# Altium PCB ESP-MONITOR_PCB.PcbDoc (part 1 of 2)
Units mm, origin at the board's own origin, x right, y up, seen from the top; angles counter-clockwise.
Board outline 62 x 40.01 mm, 2 copper layers (Top Layer, Bottom Layer); 71 components, 47 nets, 234 pads, 216 vias.
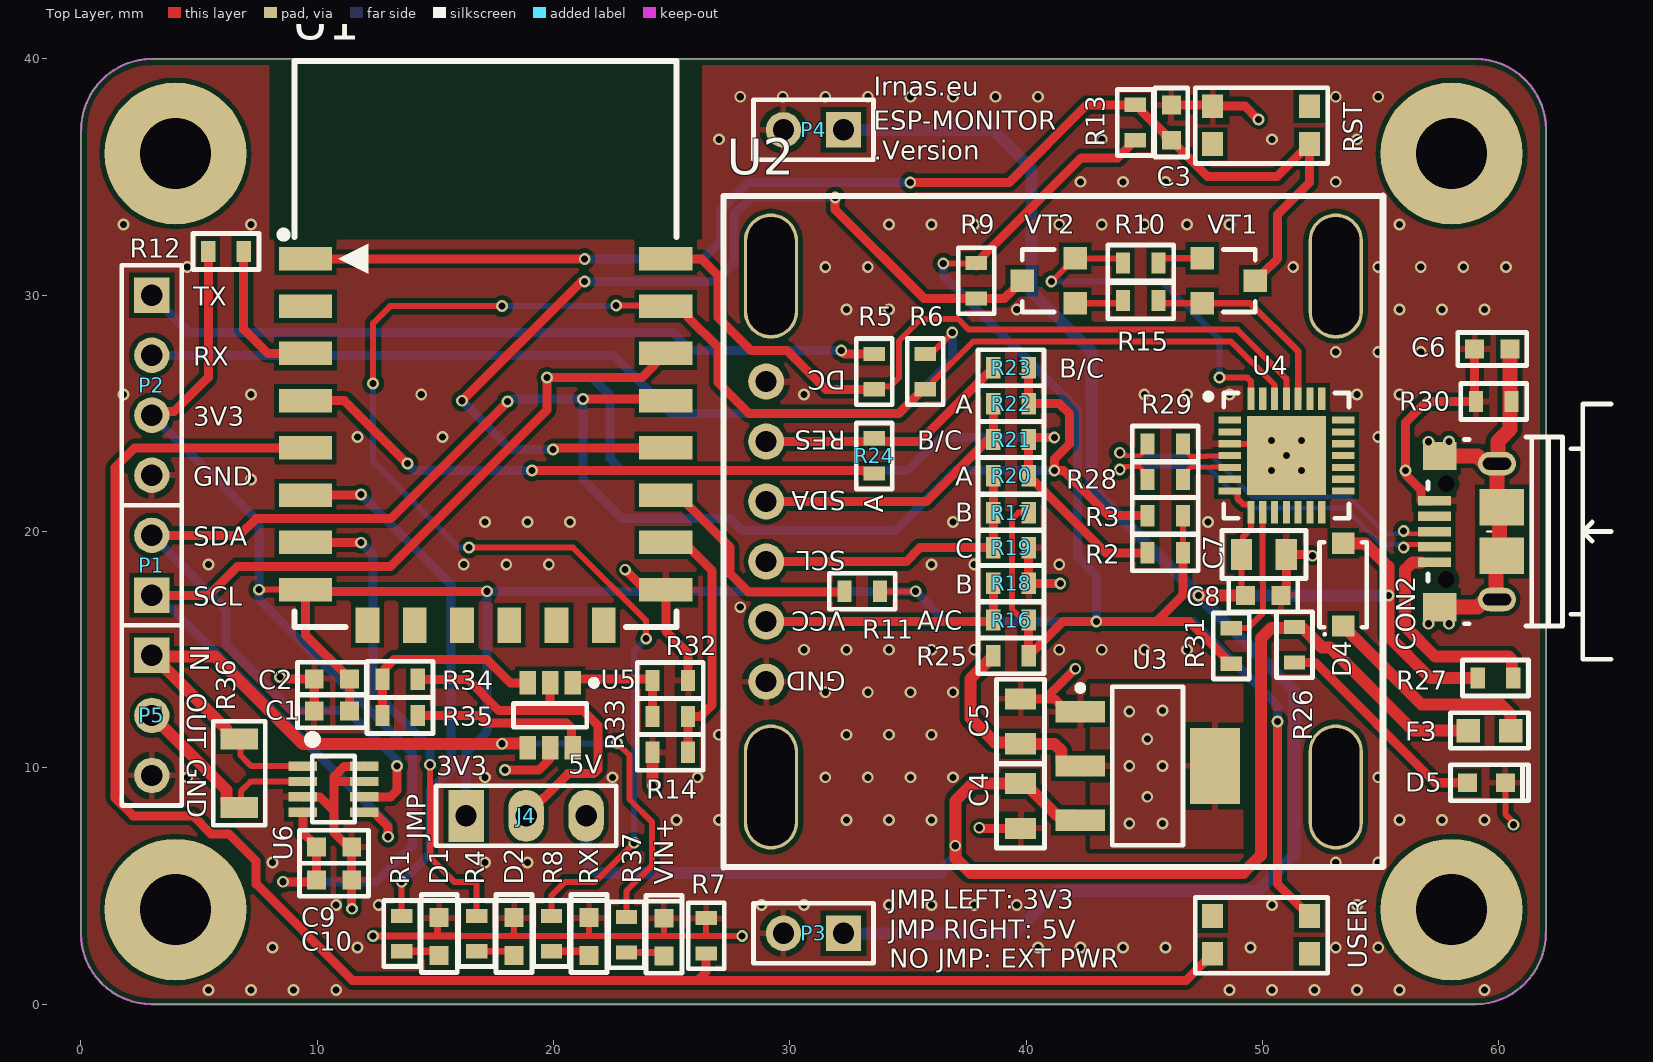
[diagram p0: Top Layer view]
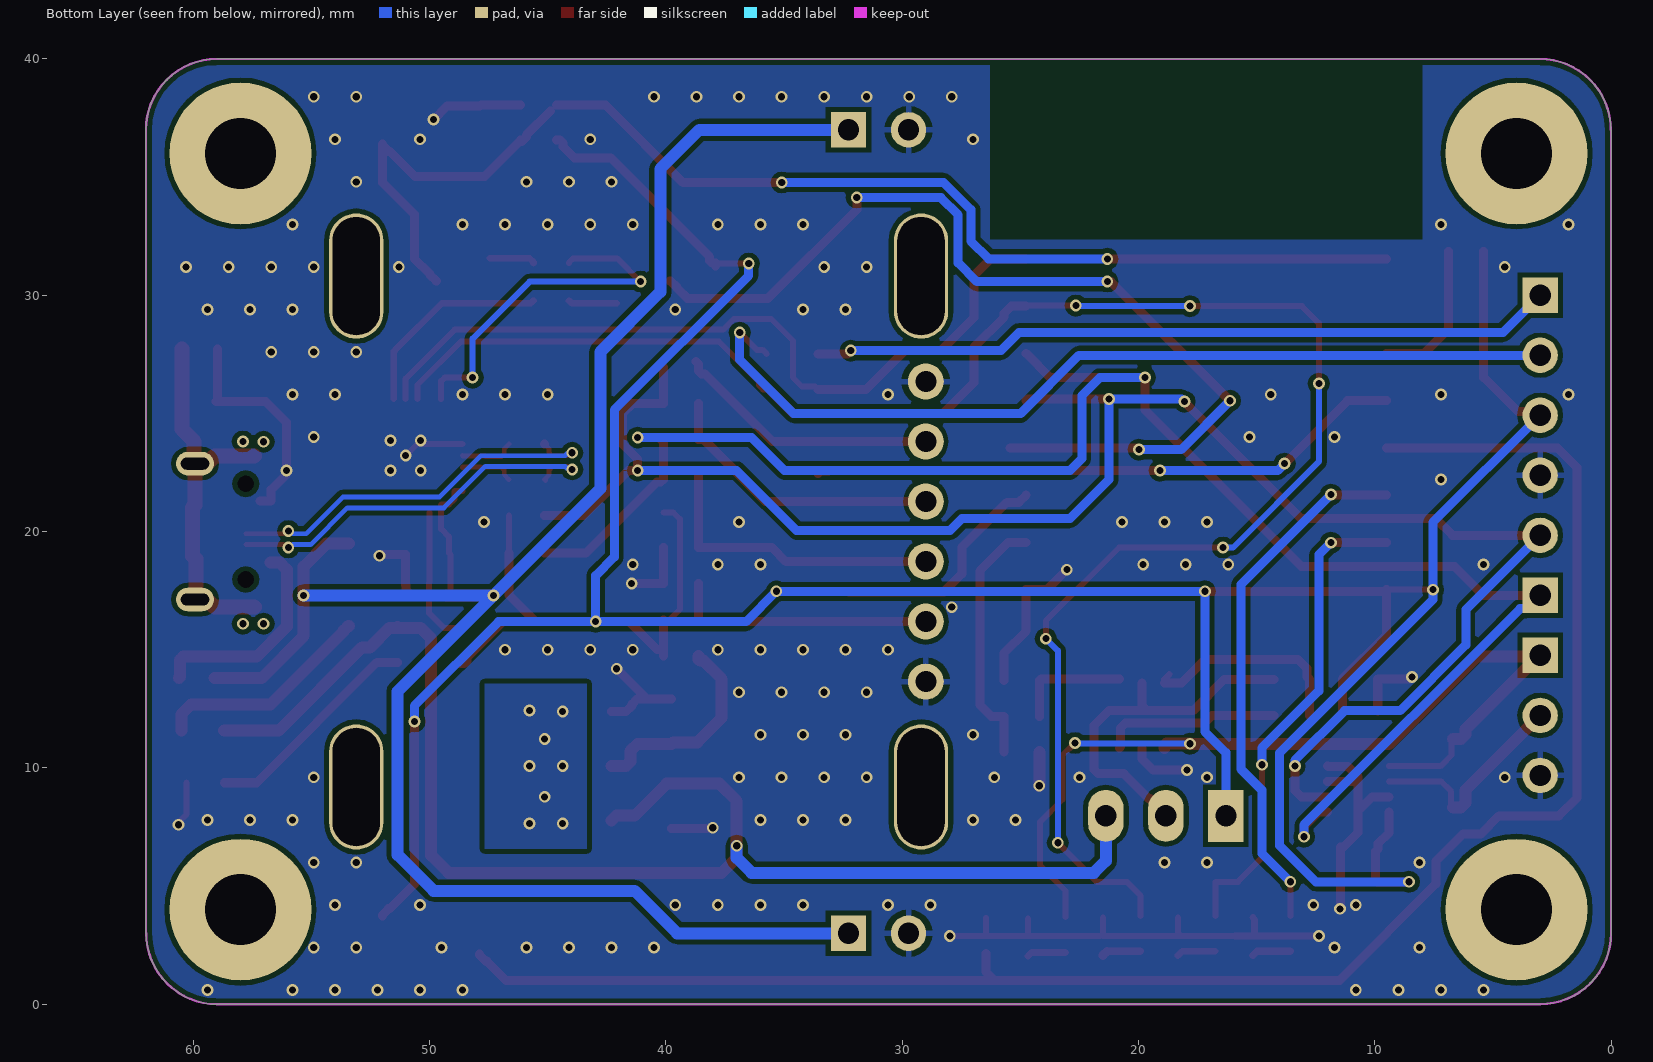
[diagram p1: Bottom Layer view, seen from below]

## Layer stack, top to bottom
Top Solder: solder mask 0.0102, Solder Resist, Dk 3.5
Top Layer: signal copper 0.0356
Dielectric 1: dielectric 0.32, FR-4, Dk 4.8
Bottom Layer: signal copper 0.0356
Bottom Solder: solder mask 0.0102, Solder Resist, Dk 3.5

## Board outline
0,3 ccw(c3,3) 3,0 59,0 58.991,-0.009 ccw(c58.974,3.007) 61.991,3.007 62,3.007 62,37 ccw(c59,37) 59,40 3.01,40 ccw(c3.01,37) 0.01,37 0,36.99

## Design rules (kind name [scope] priority, off if disabled: settings)
Clearance [All] p1: gap=0.203 ignorepadtopadclearanceinfootprint=FALSE except(0.152: Arc-Arc Arc-Track Track-Track SMDPad-SMDPad)
ComponentClearance [All] p1 off: gap=0.254 collisioncheckmode=3 verticalgap=0.254 showdistances=FALSE
DiffPairsRouting [All] p1: maxlimit=0.254 minlimit=0.254 mostfreqgap=0.254 toplayer_minwidth=0.203 toplayer_maxwidth=0.203 toplayer_prefwidth=0.203 bottomlayer_minwidth=0.203 bottomlayer_maxwidth=0.203 bottomlayer_prefwidth=0.203 maxuncoupledlength=12.7
Height [All] p1 off: minheight=0 maxheight=25.4 prefheight=12.7
HoleSize [All] p1: absolutevalues=TRUE maxlimit=7.62 minlimit=0.025 maxpercent=80.000 minpercent=20.000
PlaneConnect [All] p1: planeconnectstyle=Direct reliefexpansion=0.508 reliefentries=4 reliefconductorwidth=0.254 reliefairgap=0.254
PolygonConnect [All] p1: thpad.connectstyle=Relief thpad.reliefconductorwidth=0.254 thpad.reliefentries=4 thpad.polygonreliefangle="90 Angle" thpad.airgapwidth=0.254 smdpad.connectstyle=Relief smdpad.reliefconductorwidth=0.254 smdpad.reliefentries=4 smdpad.polygonreliefangle="90 Angle" smdpad.airgapwidth=0.254 via.connectstyle=Direct via.reliefconductorwidth=0.254 via.reliefentries=4 via.polygonreliefangle="90 Angle" via.airgapwidth=0.254
RoutingVias [All] p1: holewidth=0.3 width=0.5 viastyle="Through Hole" minholewidth=0.3 minwidth=0.5 maxholewidth=0.3 maxwidth=0.5
SilkToSilkClearance [All] p1 off: silktosilkclearance=0.254
SilkToSolderMaskClearance [IsPad] p1 off: minsilkscreentomaskgap=0.254 clearancetoexposedcopper=TRUE
SolderMaskExpansion [All] p1: expansion=0.102
Width [All] p1: maxlimit=1.27 minlimit=0.203 preferedwidth=0.254
23 further rules are at their usual default settings.

## Classes and differential pairs
component class PAGE5-CURRENT_MON: C9 C10 J4 P5 R32 R33 R34 R35 R36 R37 U5 U6 VIN+
component class PAGE2-ESP12_CORE: C1 C2 C3 D1 D2 P1 P2 R1 R2 R3 R4 R5 R6 R7 R8 R9 R10 R11 R12 R13 R14 R15 R16 R17 R18 R19 R20 R21 R22 R23 R24 RST RX U1 U2 USER VT1 VT2
component class PAGE4-POWER: C4 C5 D4 D5 F3 P3 P4 R25 R26 U3
component class PAGE3-USB_TO_UART: C6 C7 C8 CON2 R27 R28 R29 R30 R31 U4
differential pair DUSB: +DUSB_P -DUSB_N
differential pair D: +D_P -D_N

## Components (designator, comment, footprint, x,y, rotation, side; value= is the part's Value field where it differs from the comment)
C1 "1uF" CAP0603 10.623,12.401 r0 top
C2 "100nF" CAP0603 10.623,13.768 r0 top
C3 "100nF" CAP0603 46.144,37.31 r270 top
C4 "10uF /16V" CAP0805 39.763,8.385 r90 top
C5 "10uF /16V" CAP0805 39.763,11.968 r270 top
C6 "100pF" CAP0603 59.727,27.728 r0 top
C7 "10uF /16V" CAP0805 50.061,19.032 r180 top
C8 "100nF" CAP0603 50.036,17.3 r180 top
C9 "1uF" CAP0603 10.709,6.659 r180 top
C10 "100nF" CAP0603 10.709,5.262 r180 top
CON2 "microUSB" microUSB-CHINA 58.701,20 r90 top
D1 "LED RED" LED0603 15.159,2.86 r270 top
D2 "LED RED" LED0603 18.33,2.86 r270 top
D4 "MBR120VLSFT3G" SOD123 53.41,17.752 r90 top
D5 "LED RED" LED0603 59.479,9.37 r180 top
F3 "750mA" FUSE0603 59.606,11.578 r180 top
J4 "Jumper_1x3" Jumper_1x3_2.54MM 16.299,7.973 r90 top
P1 "Header 2" HDR1X2 3,17.3 r90 top
P2 "Header 4" HDR1X4 3,30 r270 top
P3 "Header 2" HDR1X2 32.27,3 r180 top locked
P4 "Header 2" HDR1X2 32.27,37 r180 top locked
P5 "Header 3" HDR1X3 3,14.76 r270 top
R1 "470R" RES0603 13.573,2.987 r270 top
R2 "4k7" RES0603 45.89,19.102 r0 top
R3 "4k7" RES0603 45.89,20.673 r0 top
R4 "470R" RES0603 16.744,2.987 r270 top
R5 "0R" RES0603 33.571,26.769 r90 top
R6 "0R" RES0603 35.73,26.769 r90 top
R7 "10k" RES0603 26.459,2.893 r270 top
R8 "470R" RES0603 19.916,2.987 r90 top
R9 "10k" RES0603 37.889,30.613 r270 top
R10 "10k" RES0603 44.849,31.365 r180 top
R11 "10k" RES0603 33.063,17.473 r180 top
R12 "10k" RES0603 6.139,31.849 r0 top
R13 "10k" RES0603 44.62,37.31 r90 top
R14 "10k" RES0603 24.94,10.665 r0 top
R15 "10k" RES0603 44.849,29.774 r0 top
R16 "A/C" RES0603 39.358,16.256 r180 top
R17 "B" RES0603 39.358,20.8 r180 top
R18 "B" RES0603 39.358,17.807 r180 top
R19 "C" RES0603 39.358,19.318 r180 top
R20 "A" RES0603 39.358,22.363 r180 top
R21 "B/C" RES0603 39.358,23.896 r180 top
R22 "A" RES0603 39.358,25.411 r180 top
R23 "B/C" RES0603 39.358,26.935 r180 top
R24 "A" RES0603 33.571,23.201 r90 top
R25 "0R" RES0603 39.358,14.741 r0 top
R26 "470R" RES0603 51.351,15.212 r90 top
R27 "0R" RES0603 59.86,13.8 r0 top
R28 "27R" RES0603 45.89,22.202 r180 top
R29 "27R" RES0603 45.89,23.702 r180 top
R30 "1M" RES0603 59.79,25.5 r0 top
R31 "10k" RES0603 48.684,15.158 r90 top
R32 "100k" RES0603 24.94,13.694 r180 top
R33 "100R" RES0603 24.94,12.17 r180 top
R34 "100k" RES0603 13.505,13.746 r180 top
R35 "100R" RES0603 13.505,12.22 r180 top
R36 "0.1R 1%" RES1206 6.698,9.776 r270 top
R37 "470R" RES0603 23.087,2.935 r90 top
RST "Tactile button" "Tactile button" 49.958,37.18 r0 top (schematic designator SW2)
RX "LED RED" LED0603 21.502,2.86 r270 top (schematic designator D3)
U1 "ESP_12_E" ESP_12_E 9.125,31.54 r0 top
U2 "OLED SSD1306" "OLED SSD1306" 29,16.19 r90 top
U3 "NCP1117" "SOT-223 - 4con" 45.139,10.08 r180 top
U4 "CP2102N" QFN50P500X500X80_HS-29N 51.01,23.215 r0 top
U5 "DMG6602SVT" TSOT26 19.855,12.22 r270 top
U6 "INA219AIDCNR" SOT23-8 10.69,9.099 r270 top
USER "Tactile button" "Tactile button" 49.958,2.911 r0 top (schematic designator SW1)
VIN+ "LED RED" LED0603 24.673,2.835 r270 top (schematic designator D6)
VT1 "L8050QLT1G" SMT_TRIODE_NPN 48.573,30.613 r270 top
VT2 "L8050QLT1G" SMT_TRIODE_NPN 40.953,30.613 r90 top

## Footprints (in the part's own frame and the unit in brackets; to place one, negate y for a bottom-side part, rotate by r counter-clockwise, add the part's x,y. Pads: shape width x height; smd on the part's side, far side on the other; paste and mask are expansions set on the pad)
CAP0603 [mm]
  rect 0.8x0.8 smd: 1(-0.75,0) 2(0.75,0)
  silkscreen extent -1.46,-0.7 1.46,0.7, body extent -0.8,-0.4 0.8,0.4, height 0.9
CAP0805 [mm]
  rect 0.9x1.3 smd: 1(-0.95,0) 2(0.95,0)
  silkscreen extent -1.78,-1.02 1.78,1.02, body extent -1,-0.6 1,0.6, height 1.5
ESP_12_E [mm] "ESP-12 Wi-Fi Module by AI-Thinker"
  rect 2.25x1 smd: 1(0.375,0) 2(0.375,-2) 3(0.375,-4) 4(0.375,-6) 5(0.375,-8) 6(0.375,-10) 7(0.375,-12) 8(0.375,-14) 15(15.625,-14) 16(15.625,-12) 17(15.625,-10) 18(15.625,-8) 19(15.625,-6) 20(15.625,-4) 21(15.625,-2) 22(15.625,0)
  rect 1x1.5 smd: 9(3,-15.5) 10(5,-15.5) 11(7,-15.5) 12(9,-15.5) 13(11,-15.5) 14(13,-15.5)
  silkscreen extent -0.7,-15.57 16.08,8.37, body extent 0,-15.49 16,8.51, height 2.75
FUSE0603 [mm]
  rect 1x1 smd: 1(-0.9,0) 2(0.9,0)
  silkscreen extent -1.65,-0.75 1.65,0.75, body extent -0.8,-0.37 0.8,0.38, height 0.77
HDR1X2 [mm] "Connector; Header; 2 Position"
  rect 1.5x1.5 hole 0.9: 1(0,0)
  round 1.5 hole 0.9: 2(2.54,0)
  silkscreen extent -1.27,-1.27 3.81,1.27
HDR1X3 [mm] "Connector; Header; 3 Position"
  rect 1.5x1.5 hole 0.9: 1(0,0)
  round 1.5 hole 0.9: 2(2.54,0) 3(5.08,0)
  silkscreen extent -1.27,-1.27 6.35,1.27
HDR1X4 [mm] "Connector; Header; 4 Position"
  rect 1.5x1.5 hole 0.9: 1(0,0)
  round 1.5 hole 0.9: 2(2.54,0) 3(5.08,0) 4(7.62,0)
  silkscreen extent -1.27,-1.27 8.89,1.27
Jumper_1x3_2.54MM [mm] "Jumper"
  rect 2.2x1.5 hole 0.9: 1(0,0)
  oval 2.2x1.5 hole 0.9: 2(0,-2.54) 3(0,-5.08)
  silkscreen extent -1.27,-6.35 1.27,1.27, body extent -1.46,-6.35 1.46,1.27, height 8.51
LED0603 [mm]
  rect 0.8x0.8 smd: 1(-0.8,0) 2(0.8,0)
  silkscreen extent -1.78,-0.76 1.52,0.76, body extent -0.85,-0.4 0.85,0.4, height 0.66
microUSB-CHINA [mm]
  rect 0.4x1.4 smd mask+0.05: 1(-1.3,1.425) 2(-0.65,1.425) 3(0,1.425) 4(0.65,1.425) 5(1.3,1.425)
  rect 1.2x1.4 smd: 6(-3.2,1.2) 7(3.2,1.2)
  oval 1x1.6 hole 0.5 slot 1.2 at 90 deg: 8(-2.875,-1.225) 9(2.875,-1.225)
  rect 1.55x1.9 smd paste-0.254: 10(-1.025,-1.425) 11(1.025,-1.425)
  rect 0x0 hole 0.7 unplated: ""(-2.028,0.925) ""(2.022,0.925)
  silkscreen extent -5.4,-6.05 5.4,1.7, body extent -4.04,-3.83 4.04,1.73, height 2.77
"OLED SSD1306" [mm]
  round 1.524 hole 0.889: 1(-2.54,0) 2(0,0) 3(2.54,0) 4(5.08,0) 5(7.62,0) 6(10.16,0)
  oval 5.3x2.3 hole 2 slot 5 at 0 deg: ""(-7,-0.2) ""(-7,-24.1) ""(14.62,-0.2) ""(14.62,-24.1)
  silkscreen extent -10.4,-26.1 18.01,1.8, body extent -9.84,-25.61 17.46,1.69, height 13
QFN50P500X500X80_HS-29N [mm] "QFN, 28-Leads, Body 5.00x5.00mm, Pitch 0.50mm, Thermal Pad 3.35x3.35mm, IPC Medium Density"
  rect 0.95x0.3 smd: 1(-2.4,1.5) 2(-2.4,1) 3(-2.4,0.5) 4(-2.4,0) 5(-2.4,-0.5) 6(-2.4,-1) 7(-2.4,-1.5) 15(2.4,-1.5) 16(2.4,-1) 17(2.4,-0.5) 18(2.4,0) 19(2.4,0.5) 20(2.4,1) 21(2.4,1.5)
  rect 0.3x0.95 smd: 8(-1.5,-2.4) 9(-1,-2.4) 10(-0.5,-2.4) 11(0,-2.4) 12(0.5,-2.4) 13(1,-2.4) 14(1.5,-2.4) 22(1.5,2.4) 23(1,2.4) 24(0.5,2.4) 25(0,2.4) 26(-0.5,2.4) 27(-1,2.4) 28(-1.5,2.4)
  rect 3.35x3.35 smd paste-0.5: 29(0,0)
  silkscreen extent -3.42,-2.65 2.65,2.65, body extent -2.5,-2.5 2.5,2.5, height 0.8
RES0603 [mm]
  rect 0.6x0.9 smd: 1(-0.75,0) 2(0.75,0)
  silkscreen extent -1.4,-0.76 1.4,0.76, body extent -0.8,-0.42 0.8,0.42, height 0.8
RES1206 [mm]
  rect 0.9x1.6 smd: 1(-1.45,0) 2(1.45,0)
  silkscreen extent -2.2,-1.1 2.2,1.1, body extent -1.6,-0.8 1.6,0.8, height 1
SMT_TRIODE_NPN [mm] "Surface mount NPN transistor, package SOT-23"
  rect 0.95x1 smd: 1(-0.95,-1.125) 2(0.95,-1.125) 3(0,1.125)
  silkscreen extent -1.33,-0.22 1.32,1.13, body extent -1.45,-1.4 1.45,1.4, height 1.3
SOD123 [mm] "SODFL, 2-Leads, Body 1.55x3.70mm, IPC Medium Density"
  rect 0.9x0.95 smd: 1(-1.75,0) 2(1.75,0)
  silkscreen extent -2.15,-1 1.8,1, body extent -1.85,-0.8 1.85,0.8, height 1.27
SOT23-8 [mm]
  rect 0.4x1.2 smd: 1(-0.975,-1.3) 2(-0.325,-1.3) 3(0.325,-1.3) 4(0.975,-1.3) 5(0.975,1.3) 6(0.325,1.3) 7(-0.325,1.3) 8(-0.975,1.3)
  silkscreen extent -2.26,-1.05 1.4,0.9, body extent -1.4,-0.89 2.79,1.91, height 13.65
"SOT-223 - 4con" [mm] "3 LEAD SOT-223 PLASTIC PACKAGE"
  rect 2.1x0.9 smd: 1(2.85,-2.3) 2(2.85,0) 3(2.85,2.3)
  rect 2.1x3.2 smd: 2(-2.85,0)
  silkscreen extent -1.5,-3.42 2.97,3.35, body extent -3.54,-3.25 3.54,3.25, height 1.65
"Tactile button" [mm]
  rect 0.9x1 smd: 1(-2.072,-0.78) 2(2.028,-0.78) 3(2.028,0.82) 4(-2.072,0.82)
  silkscreen extent -2.8,-1.6 2.8,1.6, body extent -2.32,-1.49 2.28,1.51, height 2.1
TSOT26 [mm]
  rect 1x0.7 smd: 1(-1.375,0.95) 2(-1.375,0) 3(-1.375,-0.95) 4(1.375,-0.95) 5(1.375,0) 6(1.375,0.95)
  silkscreen extent -1.5,-1.55 0.5,1.98, body extent -1.5,-1.55 1.5,1.55, height 1

## Part data
C1 C9: "MURATA - GRM188R61H105KAALD - CAP, MLCC, X5R, 1UF, 50V, 0603", Capacitance=1, Capacitance Tolerance="± 10%", Capacitor Terminals="SMD<!--FANDB--><div class=\"features-and-benefits-container\"><div class=\"features-and-benefits-description\"><span class=\"features-benefits-value\">The Murata GRM series capacitors are Multilayer Ceramic Chip Capacitors (MLCC) used for general purpose applications. These MLCC capacitors are classified into temperature compensating and high dielectric constant types depending on the change in electrostatic capacitance due to change in temperature. The temperature compensating capacitors feature a small rate of change in electrostatic capacitance as the temperature changes and are used for applications such as filters and high frequency circuit matching. The high dielectric constant capacitors use materials with a high dielectric constant and feature a large electrostatic capacitance. Typical applications are power supply decoupling and smoothing circuits.</span></div><div class=\"features-and-benefits-list\"><ul class=\"features-and-benefits-list-list\"><li class=\"features-and-benefits-list-item\">Large capacity and small size in a multilayer structure</li><li class=\"features-and-benefits-list-item\">Capacitance value ranging from 0.1pF to 220?F</li><li class=\"features-and-benefits-list-item\">Tin plated external electrodes, excellent solderability</li><li class=\"features-and-benefits-list-item\">Provides good high frequency characteristics</li><li class=\"features-and-benefits-list-item\">Excellent pulse response</li><li class=\"features-and-benefits-list-item\">High reliability</li><li class=\"features-and-benefits-list-item\">Capacitor size varies from 0.4×0.2mm to 5.7×5.0mm</li><li class=\"features-and-benefits-list-item\">Rated voltage of 2.5VDC to 3.15", Ceramic Capacitor Case="0603 [1608 Metric]", Dielectric Characteristic=X5, Manufacturer=MURATA, Manufacturer Part Number=GRM188R61H105KAALD, Operating Temperature Max=85, Operating Temperature Min=-55, Supplier Part Number 1=1845736, Voltage Rating=50, Automotive Qualification Standard=-, Capacitance Tolerance ±="± 10%", ComponentLink1Description=http://www.farnell.com/datasheets/2048611.pdf, ComponentLink1URL=http://www.farnell.com/datasheets/2048611.pdf, MSL=-, Packaging="Cut Tape", Pricing 1="10=0.093, 100=0.062, 500=0.0507, 1000=0.0465, 2000=0.0429, 4000=0.0399, 20000=0.0372, 40000=0.0365 (GBP)", Product Range="GRM Series", RoHS=YES, Stock 1=62682, Supplier 1=Farnell, SVHC="No SVHC (17-Dec-2015)"
C2 C3 C8 C10: "MURATA - GRM188R71C104KA01J - CAP, MLCC, X7R, 0.1UF, 16V, 0603", Capacitance=0.1, Capacitance Tolerance="± 10%", Ceramic Capacitor Case="0603 [1608 Metric]", Dielectric Characteristic=X7, Manufacturer=MURATA, Manufacturer Part Number=GRM188R71C104KA01J, Operating Temperature Max=125, Operating Temperature Min=-55, Supplier Part Number 1=2688519, Voltage Rating=16, Automotive Qualification Standard=-, ComponentLink1Description=http://www.farnell.com/datasheets/2189124.pdf, ComponentLink1URL=http://www.farnell.com/datasheets/2189124.pdf, MSL="MSL 1 - Unlimited", Packaging="Cut Tape", Pricing 1="10=0.0145, 100=0.0126, 500=0.0081, 2500=0.0059, 5000=0.0052, 10000=0.0046, 50000=0.0036, 100000=0.0035 (GBP)", Product Range="GRM Series", RoHS=YES, Stock 1=18297, Supplier 1=Farnell, SVHC="No SVHC (20-Jun-2016"
C4 C5 C7: "TDK - CGA4J1X5R1C106K125AC - CAP, MLCC, X5R, 10UF, 16V, 0805", Manufacturer=TDK, Manufacturer Part Number=CGA4J1X5R1C106K125AC, Supplier Part Number 1=2210948RL, ComponentLink1Description=http://bcove.me/e1v54mtm, ComponentLink1URL=http://bcove.me/e1v54mtm, ComponentLink2Description=http://www.farnell.com/datasheets/1936565.pdf, ComponentLink2URL=http://www.farnell.com/datasheets/1936565.pdf, ComponentLink3Description=http://www.farnell.com/datasheets/1683658.pdf, ComponentLink3URL=http://www.farnell.com/datasheets/1683658.pdf, Pricing 1="5=0.41, 50=0.146, 250=0.131, 500=0.12, 1000=0.103 (GBP)", RoHS=YES, Stock 1=8974, Supplier 1=Farnell
C6: "MULTICOMP   MCSH18B101K500CT   SMD Multilayer Ceramic Capacitor, MCSH Series, 100 pF,  10%, X7R, 50 V, 0603 [1608 Metric]", Case/Package=0603, Case Code (Metric)=1608, Dielectric=X7R, Manufacturer=Multicomp, Manufacturer Part Number=MCSH18B101K500CT, Max Operating Temperature=125°C, Min Operating Temperature=-55°C, Supplier Part Number 1=1856366, Tolerance=10%, Voltage Rating=50V, Capacitance=100pF, Case Code (Imperial)=0603, ComponentLink1Description=https://datasheet.ciiva.com/36858/1825494-36858405.pdf, ComponentLink1URL=https://datasheet.ciiva.com/36858/1825494-36858405.pdf, ComponentLink2Description=https://datasheet.ciiva.com/36855/1825494-36855530.pdf, ComponentLink2URL=https://datasheet.ciiva.com/36855/1825494-36855530.pdf, Packaging="Cut Tape", Pricing 1="10=0.0858, 100=0.0386, 500=0.0266, 1000=0.0203, 2000=0.0176 (EUR)", REACH SVHC="No SVHC", Stock 1=9630, Supplier 1=Farnell, Voltage Rating (DC)=50V
CON2: library part "Micro USB CHINA 1"
D1 D2 D5 RX VIN+: "BROADCOM LIMITED - HSMS-C190 - LED, RED, 10MCD, 626NM", Forward Current If=20, Forward Voltage=2.1, LED Colour=Red, Manufacturer="BROADCOM LIMITED", Manufacturer Part Number=HSMS-C190, Supplier Part Number 1=2497356, Automotive Qualification Standard=-, Bulb Size=-, ComponentLink1Description=http://www.farnell.com/datasheets/313031.pdf, ComponentLink1URL=http://www.farnell.com/datasheets/313031.pdf, ComponentLink2Description=http://www.farnell.com/datasheets/1681524.pdf, ComponentLink2URL=http://www.farnell.com/datasheets/1681524.pdf, ComponentLink3Description=http://www.farnell.com/datasheets/2165483.pdf, ComponentLink3URL=http://www.farnell.com/datasheets/2165483.pdf, LED Mounting=SMD, Lens Shape=Rectangular, Luminous Intensity=10, MSL=-, Packaging="Cut Tape", Pricing 1="1=0.361, 10=0.256, 50=0.235, 100=0.106, 200=0.101 (GBP)", Product Range=-, RoHS=YES, Stock 1=7534, Supplier 1=Farnell, SVHC="No SVHC (17-Dec-2015)<!--FANDB--><div class=\"features-and-benefits-container\"><div class=\"features-and-benefits-description\"><span class=\"features-benefits-value\">The HSMS-C190 is a HER SMD Chip LED with untinted/diffused lens, made of GaP. It is designed in an industry standard package 1.6 x 0.8mm footprint with 0.8mm profile. It is compatible with IR reflow solder processes. The small size and wide viewing angle make this LED prime choices for backlighting applications and front panel illumination especially where space is a premium.</span></div><div class=\"features-and-benefits-list\"><ul class=\"features-and-benefits-list-list\"><li class=\"features-and-benefits-list-item\">Small size</li><li class=\"features-and-benefits-list-item\">Industry standard footprint</li><li class=\"features-and-benefits-list-item\">Compatible with IR solder</li><li class=\"features-and-benefits-list-item\">Diffused optics</li><li class=\"features-and-benefits-list-item\">-40 to 85", Viewing Angle=170°, Wavelength Typ=626
D4: "ON SEMICONDUCTOR - MBR120VLSFT3G - SCHOTTKY RECT, 1A, 20V, SOD123", Manufacturer="ON SEMICONDUCTOR", Supplier Part Number 1=2533227, ComponentLink1Description=http://www.farnell.com/datasheets/2028665.pdf, ComponentLink1URL=http://www.farnell.com/datasheets/2028665.pdf, ComponentLink2Description=http://www.farnell.com/datasheets/2159241.pdf, ComponentLink2URL=http://www.farnell.com/datasheets/2159241.pdf, Manufacturer Part Number=MBR120VLSFT3G, Pricing 1="1=0.335, 10=0.255, 100=0.125, 250=0.122, 500=0.101, 1000=0.079 (GBP)", RoHS=YES, Stock 1=7030, Supplier 1=Farnell
F3: library part "PTC FUSE 750mA", "LITTELFUSE - 0603L035YR - RESETTABLE FUSE, PTC, 40A, 6V, 0605", Carrying Current Max=40, Holding Current=350, Initial Resistance Max=1, Manufacturer=LITTELFUSE, Manufacturer Part Number=0603L035YR, Operating Temperature Max=85, Operating Temperature Min=-40, Operating Voltage=6, Power Dissipation Pd="0.5W<!--FANDB--><div class=\"features-and-benefits-container\"><div class=\"features-and-benefits-description\"><span class=\"features-benefits-value\">The POLYFUSE 0603", PTC Fuse Case Style="0603 [1608 Metric]", Supplier Part Number 1=1832099, Tripping Current=750, Automotive Qualification Standard=-, ComponentLink1Description=http://www.farnell.com/datasheets/611622.pdf, ComponentLink1URL=http://www.farnell.com/datasheets/611622.pdf, Holding Current Max Ih=350, Pricing 1="10=1.56, 100=1.22, 500=1.03, 1000=0.917, 2000=0.877, 4000=0.86, 20000=0.842, 40000=0.825 (GBP)", Product Range="POLYFUSE 0603", RoHS=YES, Stock 1=2393, Supplier 1=Farnell, Thermistor Mounting=SMD, Voltage Rating=6
P1 P3 P4: "Header, 2-Pin", LatestRevisionDate=17-Jul-2002, LatestRevisionNote="Re-released for DXP Platform.", Publisher="Altium Limited"
P2: "Header, 4-Pin", LatestRevisionDate=17-Jul-2002, LatestRevisionNote="Re-released for DXP Platform.", Publisher="Altium Limited"
P5: "Header, 3-Pin", LatestRevisionDate=17-Jul-2002, LatestRevisionNote="Re-released for DXP Platform.", Publisher="Altium Limited"
R1 R4 R8 R26 R37: "MULTICOMP - MCMR06X471 JTL - RES, CERAMIC, 470R, 5%, 0.1W, 0603", Manufacturer=MULTICOMP, Manufacturer Part Number="MCMR06X471 JTL", Supplier Part Number 1=2073513, ComponentLink1Description=http://www.farnell.com/datasheets/1716707.pdf, ComponentLink1URL=http://www.farnell.com/datasheets/1716707.pdf, Pricing 1="10=0.0089, 100=0.0076, 500=0.0063, 1000=0.0049, 2500=0.0033, 5000=0.0024, 25000=0.0016, 50000=0.0013 (GBP)", RoHS=Y-EX, Stock 1=3786, Supplier 1=Farnell
R2 R3: "MULTICOMP - MCMR06X4701FTL - RES, CERAMIC, 4K7, 1%, 0.1W, 0603", Manufacturer=MULTICOMP, Manufacturer Part Number=MCMR06X4701FTL, Power Rating=100, Resistance=4.7, Resistance Tolerance="± 1%", Resistor Case Style="0603 [1608 Metric]", Resistor Element Material=Ceramic, Supplier Part Number 1=2073509, Temperature Coefficient="± 100", Voltage Rating=75, Automotive Qualification Standard=-, ComponentLink1Description=http://www.farnell.com/datasheets/1716707.pdf, ComponentLink1URL=http://www.farnell.com/datasheets/1716707.pdf, Packaging="Cut Tape", Pricing 1="10=0.0085, 100=0.0051, 500=0.0036, 1000=0.0028, 2500=0.0023 (GBP)", Product Range="MCMR Series", RoHS=Y-EX, Stock 1=218618, Supplier 1=Farnell, SVHC="No SVHC (12-Jan-2017)<!--FANDB--><div class=\"features-and-benefits-container\"><div class=\"features-and-benefits-description\"><span class=\"features-benefits-value\">The Multicomp MCMR series resistors are automotive grade, anti sulphured thick film chip resistor. The resistance range includes E24 and E96 decade values from 1ohm to 10Mohm. These resistors are constructed on top of a high grade ceramic body.</span></div><div class=\"features-and-benefits-list\"><ul class=\"features-and-benefits-list-list\"><li class=\"features-and-benefits-list-item\">EIA 0402, 0603, 0805, 1206 chip sizes available</li><li class=\"features-and-benefits-list-item\">High reliability and stability</li><li class=\"features-and-benefits-list-item\">Automotive grade AEC-Q200 compliant</li><li class=\"features-and-benefits-list-item\">Complaint with (IEC 60068-1) 55/155/56 climatic category</li><li class=\"features-and-benefits-list-item\">Maximum operation voltage of 50V, 75V, 150V and 200V</li><li class=\"features-and-benefits-list-item\">Power rating of 62.5mW, 100mW, 125mW and 250mW</li><li class=\"features-and-benefits-list-item\">Available in ±1% and ±5% tolerance</li><li class=\"features-and-benefits-list-item\">Temperature coefficient (TCR) of +200ppm/°C, +100ppm/°C and -200ppm/°C to +400ppm/°C</li><li class=\"features-and-benefits-list-item\">Operating temperature range -55°C to 155"
R5 R6 R25 R27: "BOURNS - CR0603-J/-000ELF - RES, THICK FILM, 0R, 5%, 0.1W, 0603", Manufacturer=BOURNS, Manufacturer Part Number=CR0603-J/-000ELF, Power Rating=100, Resistance=0, Resistance Tolerance="± 5%", Resistor Case Style="0603 [1608 Metric]", Resistor Element Material="Thick Film", Resistor Mounting="Surface Mount Device<!--FANDB--><div class=\"features-and-benefits-container\"><div class=\"features-and-benefits-description\"><span class=\"features-benefits-value\">The Bourns CR series are standard thick film chip resistors. These resistors provide flexibility of performance, space saving and low cost. The Resistance range includes E96 and E24 decade values from 1ohm to 10Mohm.</span></div><div class=\"features-and-benefits-list\"><ul class=\"features-and-benefits-list-list\"><li class=\"features-and-benefits-list-item\">0201, 0402, 0603, 0805, 1206, 1210, 2010, 2512 standard case sizes available</li><li class=\"features-and-benefits-list-item\">±1% and ±5% tolerance</li><li class=\"features-and-benefits-list-item\">±100ppm/°C, ±200ppm/°C and ±250ppm/°C TCR values available</li><li class=\"features-and-benefits-list-item\">Power rating selectable for 50mW, 63mW, 0.1W, 0.125W, 0.25W, 0.5W and 1W based on ordering</li><li class=\"features-and-benefits-list-item\">Jumpers are available for all size</li><li class=\"features-and-benefits-list-item\">3 layer termination process with nickel barrier prevents leaching & provides excellent solderability</li><li class=\"features-and-benefits-list-item\">Suitable for all type of soldering processes</li><li class=\"features-and-benefits-list-item\">Tight dimensional tolerances</li><li class=\"features-and-benefits-list-item\">Maximum working voltage depends on case size</li><li class=\"features-and-benefits-list-item\">Operating temperature of -55°C to +125°C(CR0201) and -55°C to +155", Supplier Part Number 1=2008343, Temperature Coefficient=-, Voltage Rating=50, Automotive Qualification Standard=-, ComponentLink1Description=http://www.bourns.com/engineering/CHPREZTR/cr0603.stp, ComponentLink1URL=http://www.bourns.com/engineering/CHPREZTR/cr0603.stp, ComponentLink2Description=http://www.farnell.com/datasheets/2178762.pdf, ComponentLink2URL=http://www.farnell.com/datasheets/2178762.pdf, MSL="MSL 1 - Unlimited", Packaging="Cut Tape", Pricing 1="10=0.0146, 250=0.0097, 1000=0.0073, 5000=0.0049, 12500=0.0042 (GBP)", Product Range="CR Series", RoHS=YES, Stock 1=58200, Supplier 1=Farnell, SVHC="No SVHC (17-Dec-2015)"
R7 R9 R10 R11 R12 R13 R14 R15 R31: "MULTICOMP - MCMR06X103 JTL - RES, CERAMIC, 10K, 5%, 0.1W, 0603", Manufacturer=MULTICOMP, Manufacturer Part Number="MCMR06X103 JTL", Power Rating=100, Resistance=10, Resistance Tolerance="± 5%", Resistor Case Style="0603 [1608 Metric]", Resistor Element Material=Ceramic, Supplier Part Number 1=2073356, Temperature Coefficient="± 100", Voltage Rating=75, Automotive Qualification Standard="-<!--FANDB--><div class=\"features-and-benefits-container\"><div class=\"features-and-benefits-description\"><span class=\"features-benefits-value\">The Multicomp MCMR series resistors are automotive grade, anti sulphured thick film chip resistor. The resistance range includes E24 and E96 decade values from 1ohm to 10Mohm. These resistors are constructed on top of a high grade ceramic body.</span></div><div class=\"features-and-benefits-list\"><ul class=\"features-and-benefits-list-list\"><li class=\"features-and-benefits-list-item\">EIA 0402, 0603, 0805, 1206 chip sizes available</li><li class=\"features-and-benefits-list-item\">High reliability and stability</li><li class=\"features-and-benefits-list-item\">Automotive grade AEC-Q200 compliant</li><li class=\"features-and-benefits-list-item\">Complaint with (IEC 60068-1) 55/155/56 climatic category</li><li class=\"features-and-benefits-list-item\">Maximum operation voltage of 50V, 75V, 150V and 200V</li><li class=\"features-and-benefits-list-item\">Power rating of 62.5mW, 100mW, 125mW and 250mW</li><li class=\"features-and-benefits-list-item\">Available in ±1% and ±5% tolerance</li><li class=\"features-and-benefits-list-item\">Temperature coefficient (TCR) of +200ppm/°C, +100ppm/°C and -200ppm/°C to +400ppm/°C</li><li class=\"features-and-benefits-list-item\">Operating temperature range -55°C to 155", ComponentLink1Description=http://www.farnell.com/datasheets/1716707.pdf, ComponentLink1URL=http://www.farnell.com/datasheets/1716707.pdf, Packaging="Cut Tape", Pricing 1="10=0.0087, 100=0.0074, 500=0.0061, 1000=0.0048, 2500=0.0032, 5000=0.0024, 25000=0.0016, 50000=0.0013 (GBP)", Product Range="MCMR Series", RoHS=Y-EX, Stock 1=19791, Supplier 1=Farnell
R16 R17 R18 R19 R20 R21 R22 R23 R24: library part 0R, "BOURNS - CR0603-J/-000ELF - RES, THICK FILM, 0R, 5%, 0.1W, 0603", Manufacturer=BOURNS, Manufacturer Part Number=CR0603-J/-000ELF, Power Rating=100, Resistance=0, Resistance Tolerance="± 5%", Resistor Case Style="0603 [1608 Metric]", Resistor Element Material="Thick Film", Resistor Mounting="Surface Mount Device<!--FANDB--><div class=\"features-and-benefits-container\"><div class=\"features-and-benefits-description\"><span class=\"features-benefits-value\">The Bourns CR series are standard thick film chip resistors. These resistors provide flexibility of performance, space saving and low cost. The Resistance range includes E96 and E24 decade values from 1ohm to 10Mohm.</span></div><div class=\"features-and-benefits-list\"><ul class=\"features-and-benefits-list-list\"><li class=\"features-and-benefits-list-item\">0201, 0402, 0603, 0805, 1206, 1210, 2010, 2512 standard case sizes available</li><li class=\"features-and-benefits-list-item\">±1% and ±5% tolerance</li><li class=\"features-and-benefits-list-item\">±100ppm/°C, ±200ppm/°C and ±250ppm/°C TCR values available</li><li class=\"features-and-benefits-list-item\">Power rating selectable for 50mW, 63mW, 0.1W, 0.125W, 0.25W, 0.5W and 1W based on ordering</li><li class=\"features-and-benefits-list-item\">Jumpers are available for all size</li><li class=\"features-and-benefits-list-item\">3 layer termination process with nickel barrier prevents leaching & provides excellent solderability</li><li class=\"features-and-benefits-list-item\">Suitable for all type of soldering processes</li><li class=\"features-and-benefits-list-item\">Tight dimensional tolerances</li><li class=\"features-and-benefits-list-item\">Maximum working voltage depends on case size</li><li class=\"features-and-benefits-list-item\">Operating temperature of -55°C to +125°C(CR0201) and -55°C to +155", Supplier Part Number 1=2008343, Temperature Coefficient=-, Voltage Rating=50, Automotive Qualification Standard=-, ComponentLink1Description=http://www.bourns.com/engineering/CHPREZTR/cr0603.stp, ComponentLink1URL=http://www.bourns.com/engineering/CHPREZTR/cr0603.stp, ComponentLink2Description=http://www.farnell.com/datasheets/2178762.pdf, ComponentLink2URL=http://www.farnell.com/datasheets/2178762.pdf, MSL="MSL 1 - Unlimited", Packaging="Cut Tape", Pricing 1="10=0.0146, 250=0.0097, 1000=0.0073, 5000=0.0049, 12500=0.0042 (GBP)", Product Range="CR Series", RoHS=YES, Stock 1=58200, Supplier 1=Farnell, SVHC="No SVHC (17-Dec-2015)"
R28 R29: "MULTICOMP         MCWR06X27R0FTL            Surface Mount Chip Resistor, Thick Film, MCWR Series, 27 ohm, 100 mW,  1%, 50 V", Case/Package=0603, Case Code (Metric)=1608, Manufacturer=Multicomp, Manufacturer Part Number=MCWR06X27R0FTL, Power Rating=100mW, Supplier Part Number 1=2447316, Temperature Coefficient=100ppm/°C, Tolerance=1%, Voltage Rating=50V, Case Code (Imperial)=0603, ComponentLink1Description=https://datasheet.ciiva.com/46436/1849611-46436376.pdf, ComponentLink1URL=https://datasheet.ciiva.com/46436/1849611-46436376.pdf, Composition="Thick Film", Mount="Surface Mount", Packaging="Cut Tape", REACH SVHC=Unknown, Resistance=27R, Stock 1=0, Supplier 1=Farnell, Voltage Rating (DC)=50V
R30: "MULTICOMP - MC0063W060311M - RES, THICK FILM, 1M, 1%, 0.063W, 0603", Manufacturer=MULTICOMP, Manufacturer Part Number=MC0063W060311M, Operating Temperature Max=155, Operating Temperature Min=-55, Operating Temperature Range="-55°C to +155", Power Rating=63, Resistance=1, Resistance Tolerance="± 1%", Resistor Case Style="0603 [1608 Metric]", Resistor Element Material="Thick Film", Resistor Mounting="Surface Mount Device", Supplier Part Number 1=9330410, Temperature Coeff. +=100, Temperature Coefficient="± 100", Tolerance +=1%, Voltage Rating=50, Voltage Rating V DC="50V<!--FANDB--><div class=\"features-and-benefits-container\"><div class=\"features-and-benefits-description\"><span class=\"features-benefits-value\">The Multicomp MC series current sense resistors are thick film chip resistors. The resistance range includes E96 and E24 decade values from 1ohm to 10Mohm.</span></div><div class=\"features-and-benefits-list\"><ul class=\"features-and-benefits-list-list\"><li class=\"features-and-benefits-list-item\">EIA 0402, 0603, 0805, 1206 chip sizes available</li><li class=\"features-and-benefits-list-item\">Small size and low weight</li><li class=\"features-and-benefits-list-item\">Suitable for both wave and reflow soldering</li><li class=\"features-and-benefits-list-item\">Reduction of assembly costs</li><li class=\"features-and-benefits-list-item\">Maximum working voltage of 50V(0402, 0603), 150V(0805), 200V(1206)</li><li class=\"features-and-benefits-list-item\">Available in ±1%, ±2% and ±5% tolerance</li><li class=\"features-and-benefits-list-item\">Power rating of 62.5mW, 100mW and 125mW</li><li class=\"features-and-benefits-list-item\">±400ppm/°C(1ohm to 10ohm), ±200ppm/°C(11ohm to 100ohm), ±100", Automotive Qualification Standard=-, ComponentLink1Description=http://www.farnell.com/datasheets/1788326.pdf, ComponentLink1URL=http://www.farnell.com/datasheets/1788326.pdf, ComponentLink2Description=http://www.farnell.com/cad/1558928.zip, ComponentLink2URL=http://www.farnell.com/cad/1558928.zip, External Depth=0.45, External Length / Height=1.6, External Width=0.8, No. of Pins=2, Packaging="Cut Tape", Pricing 1="10=0.0011, 100=0.001, 500=0.0009, 1000=0.0008, 2500=0.0007 (GBP)", Product Range="MC Series", Reel Quantity=5000, RoHS=Y-EX, Stock 1=333415, Supplier 1=Farnell, SVHC="No SVHC (17-Dec-2015)", Tape Width=8, Temperature Coeff. -=100, Tolerance -=1%
R32 R34: "MULTICOMP - MCMR06X104 JTL - RES, CERAMIC, 100K, 5%, 0.1W, 0603", Manufacturer=MULTICOMP, Manufacturer Part Number="MCMR06X104 JTL", Power Rating=100, Resistance Tolerance="± 5%", Resistor Case Style="0603 [1608 Metric]", Resistor Element Material=Ceramic, Resistor Mounting="Surface Mount Device<!--FANDB--><div class=\"features-and-benefits-container\"><div class=\"features-and-benefits-description\"><span class=\"features-benefits-value\">The Multicomp MCMR series resistors are automotive grade, anti sulphured thick film chip resistor. The resistance range includes E24 and E96 decade values from 1ohm to 10Mohm. These resistors are constructed on top of a high grade ceramic body.</span></div><div class=\"features-and-benefits-list\"><ul class=\"features-and-benefits-list-list\"><li class=\"features-and-benefits-list-item\">EIA 0402, 0603, 0805, 1206 chip sizes available</li><li class=\"features-and-benefits-list-item\">High reliability and stability</li><li class=\"features-and-benefits-list-item\">Automotive grade AEC-Q200 compliant</li><li class=\"features-and-benefits-list-item\">Complaint with (IEC 60068-1) 55/155/56 climatic category</li><li class=\"features-and-benefits-list-item\">Maximum operation voltage of 50V, 75V, 150V and 200V</li><li class=\"features-and-benefits-list-item\">Power rating of 62.5mW, 100mW, 125mW and 250mW</li><li class=\"features-and-benefits-list-item\">Available in ±1% and ±5% tolerance</li><li class=\"features-and-benefits-list-item\">Temperature coefficient (TCR) of +200ppm/°C, +100ppm/°C and -200ppm/°C to +400ppm/°C</li><li class=\"features-and-benefits-list-item\">Operating temperature range -55°C to 155", Supplier Part Number 1=2073357, Temperature Coefficient="± 100", Voltage Rating=75, Automotive Qualification Standard=-, ComponentLink1Description=http://www.farnell.com/datasheets/1716707.pdf, ComponentLink1URL=http://www.farnell.com/datasheets/1716707.pdf, Packaging="Cut Tape", Pricing 1="10=0.0109, 100=0.0085, 500=0.006, 1000=0.0048, 2500=0.004, 5000=0.003, 25000=0.002, 50000=0.0016 (GBP)", Product Range="MCMR Series", Resistance=100, RoHS=Y-EX, Stock 1=187, Supplier 1=Farnell
R33 R35: "MULTICOMP - MC0063W06031100R - RES, THICK FILM, 100R, 1%, 0.063W, 0603", Manufacturer=MULTICOMP, Manufacturer Part Number=MC0063W06031100R, Operating Temperature Max=155, Operating Temperature Min=-55, Operating Temperature Range="-55°C to +155", Power Rating=63, Resistance=100, Resistance Tolerance="± 1%", Resistor Case Style="0603 [1608 Metric]", Resistor Element Material="Thick Film", Resistor Mounting="Surface Mount Device", Supplier Part Number 1=9330364, Temperature Coeff. +=200, Temperature Coefficient="± 200", Tolerance +=1%, Voltage Rating=50, Voltage Rating V DC="50V<!--FANDB--><div class=\"features-and-benefits-container\"><div class=\"features-and-benefits-description\"><span class=\"features-benefits-value\">The Multicomp MC series current sense resistors are thick film chip resistors. The resistance range includes E96 and E24 decade values from 1ohm to 10Mohm.</span></div><div class=\"features-and-benefits-list\"><ul class=\"features-and-benefits-list-list\"><li class=\"features-and-benefits-list-item\">EIA 0402, 0603, 0805, 1206 chip sizes available</li><li class=\"features-and-benefits-list-item\">Small size and low weight</li><li class=\"features-and-benefits-list-item\">Suitable for both wave and reflow soldering</li><li class=\"features-and-benefits-list-item\">Reduction of assembly costs</li><li class=\"features-and-benefits-list-item\">Maximum working voltage of 50V(0402, 0603), 150V(0805), 200V(1206)</li><li class=\"features-and-benefits-list-item\">Available in ±1%, ±2% and ±5% tolerance</li><li class=\"features-and-benefits-list-item\">Power rating of 62.5mW, 100mW and 125mW</li><li class=\"features-and-benefits-list-item\">±400ppm/°C(1ohm to 10ohm), ±200ppm/°C(11ohm to 100ohm), ±100", Automotive Qualification Standard=-, ComponentLink1Description=http://www.farnell.com/datasheets/1788326.pdf, ComponentLink1URL=http://www.farnell.com/datasheets/1788326.pdf, ComponentLink2Description=http://www.farnell.com/cad/1561149.zip, ComponentLink2URL=http://www.farnell.com/cad/1561149.zip, ComponentLink3Description=http://www.farnell.com/datasheets/2289252.pdf, ComponentLink3URL=http://www.farnell.com/datasheets/2289252.pdf, External Depth=0.45, External Length / Height=1.6, External Width=0.8, No. of Pins=2, Packaging="Cut Tape", Pricing 1="10=0.0011, 100=0.001, 500=0.0009, 1000=0.0008, 2500=0.0007 (GBP)", Product Range="MC Series", Reel Quantity=5000, RoHS=Y-EX, Stock 1=78152, Supplier 1=Farnell, SVHC="No SVHC (12-Jan-2017)", Tape Width=8, Temperature Coeff. -=200, Tolerance -=1%
R36: library part "0.1R 1% 1206", "TE CONNECTIVITY - TL2BR10FTE - RESISTOR, METAL , R10, 0.25W, 1%, 1206", Manufacturer="TE CONNECTIVITY", Manufacturer Part Number=TL2BR10FTE, Power Rating=250, Resistance=0.1, Resistance Tolerance="± 1%", Resistor Case Style="1206 [3216 Metric]", Resistor Element Material="Metal Foil", Supplier Part Number 1=2330389, Temperature Coefficient="± 75", Automotive Qualification Standard="-<!--FANDB--><div class=\"features-and-benefits-container\"></div>", ComponentLink1Description=http://www.farnell.com/datasheets/580081.pdf, ComponentLink1URL=http://www.farnell.com/datasheets/580081.pdf, Packaging="Cut Tape", Pricing 1="10=1.07, 100=0.698, 500=0.531, 1000=0.509, 2000=0.487, 4000=0.465, 20000=0.456, 40000=0.446 (GBP)", Product Range="TL Series", RoHS=YES, Stock 1=1781, Supplier 1=Farnell
RST USER: library part KMR221NGLFS, "SWITCH TACTILE SPST-NO 0.05A 32V", Actuator Color=N/A, Contact Rating @ Voltage="1 A", Dielectric Strength=">=250 Vrms", Manufacturer="ITT C&K", Maximum DC Voltage Rating="32 V", Minimum Insulation Resistance=">=1000 MOhm", Operating Force="2 N", Operating Temperature="-40 to 85 C", Supplier Part Number 1=2845727, Actuator Length="0.5 mm", Actuator Style="Round Button", Base Material=N/A, Body Orientation=Straight, ComponentLink1Description=https://datasheet.ciiva.com/16443/kmr221nglfs-16443038.pdf, ComponentLink1URL=https://datasheet.ciiva.com/16443/kmr221nglfs-16443038.pdf, ComponentLink2Description=https://datasheet.ciiva.com/2900/kmr2-9aug12-2900169.pdf, ComponentLink2URL=https://datasheet.ciiva.com/2900/kmr2-9aug12-2900169.pdf, ComponentLink3Description=https://datasheet.ciiva.com/2900/kmr2-9aug12-2900170.pdf, ComponentLink3URL=https://datasheet.ciiva.com/2900/kmr2-9aug12-2900170.pdf, ComponentLink4Description=https://datasheet.ciiva.com/16695/kmr2-9aug12-16695914.pdf, ComponentLink4URL=https://datasheet.ciiva.com/16695/kmr2-9aug12-16695914.pdf, ComponentLink5Description=https://datasheet.ciiva.com/2900/kmr2-9aug12-2900171.pdf, ComponentLink5URL=https://datasheet.ciiva.com/2900/kmr2-9aug12-2900171.pdf, Contact Material=Silver, Contact Plating=Silver, Dimension="2.8 x 4.6 x 1.9 mm", ECCN=EAR99, Electrical Life=N/A, Family="KMR 2", Ground Terminal=No, Housing Material=N/A, HTS=8536501199, Illumination Type=N/R, Manufacturer Part Number=KMR221NGLFS, Maximum AC Voltage Rating=N/A, Mechanical Life="200000 Cycles", Mounting="Surface Mount,Gull Wing", Packaging="Tape and Reel", Part No=KMR221NGLFS, Pole Throw Configuration=SPST, Pricing 1="10=0.278, 500=0.264, 1000=0.208, 5000=0.204, 10000=0.2 (GBP)", Product Weight=N/A, RoHS=Yes, Seal Description=N/A, Seal Location=N/A, Stock 1=5345, Supplier 1="C&K Components", Supplier Standard Pack=7,000, Switch Configuration=N.O., Type=Micro-Miniature
U1: "ESP-12 Wi-Fi Module by AI-Thinker", IC=ESP8266-EX, Vendor=Ai-thinker
U3: "NCP1117, NCV1117. 1.0 A Low-Dropout Positive  Fixed and Adjustable  Voltage Regulators"
U4: library part CP2102N-A01-GQFN28, "SILICON LABS         CP2102N-A01-GQFN28             Interface Bridges, USB to UART, 3 V, 3.6 V, QFN, 28 Pins, -40 C                          New", Case/Package=QFN, Manufacturer="Silicon Labs", Max Operating Temperature=85°C, Max Supply Voltage=3.6V, Min Operating Temperature=-40°C, Min Supply Voltage=3V, Supplier Part Number 1=2577279, ComponentLink1Description=Datasheet, ComponentLink1URL=https://www.silabs.com/documents/public/data-sheets/cp2102n-datasheet.pdf, ComponentLink2Description="Reference design", ComponentLink2URL=https://download.mikroe.com/documents/add-on-boards/click/usb-uart-3/usb-3-uart-click-schematic-v100.pdf, Manufacturer Part Number=CP2102N-A01-GQFN28, Number of Pins=28, Pricing 1="1=1.31, 10=1.2, 25=1.11, 50=1.09, 100=1.07, 250=1.05, 500=1.03, 1000=1.01 (GBP)", REACH SVHC=Unknown, Stock 1=729, Supplier 1=Farnell